# Altium PCB 野火_EBF6ULL F1 核心板_PCB封装参考设计_AD格式.PcbDoc
Units mil, origin at the board's own origin, x right, y up, seen from the top; angles counter-clockwise.
Board outline 2666.42 x 1225.47 mil, 6 copper layers (Signal, Signal #001, Signal #002, Signal #003, Signal #004, Signal #005), stack 47.2 mil thick; 3 components, 2 nets, 206 pads, 0 vias.
Unrouted connection lines stored in the file: 81.
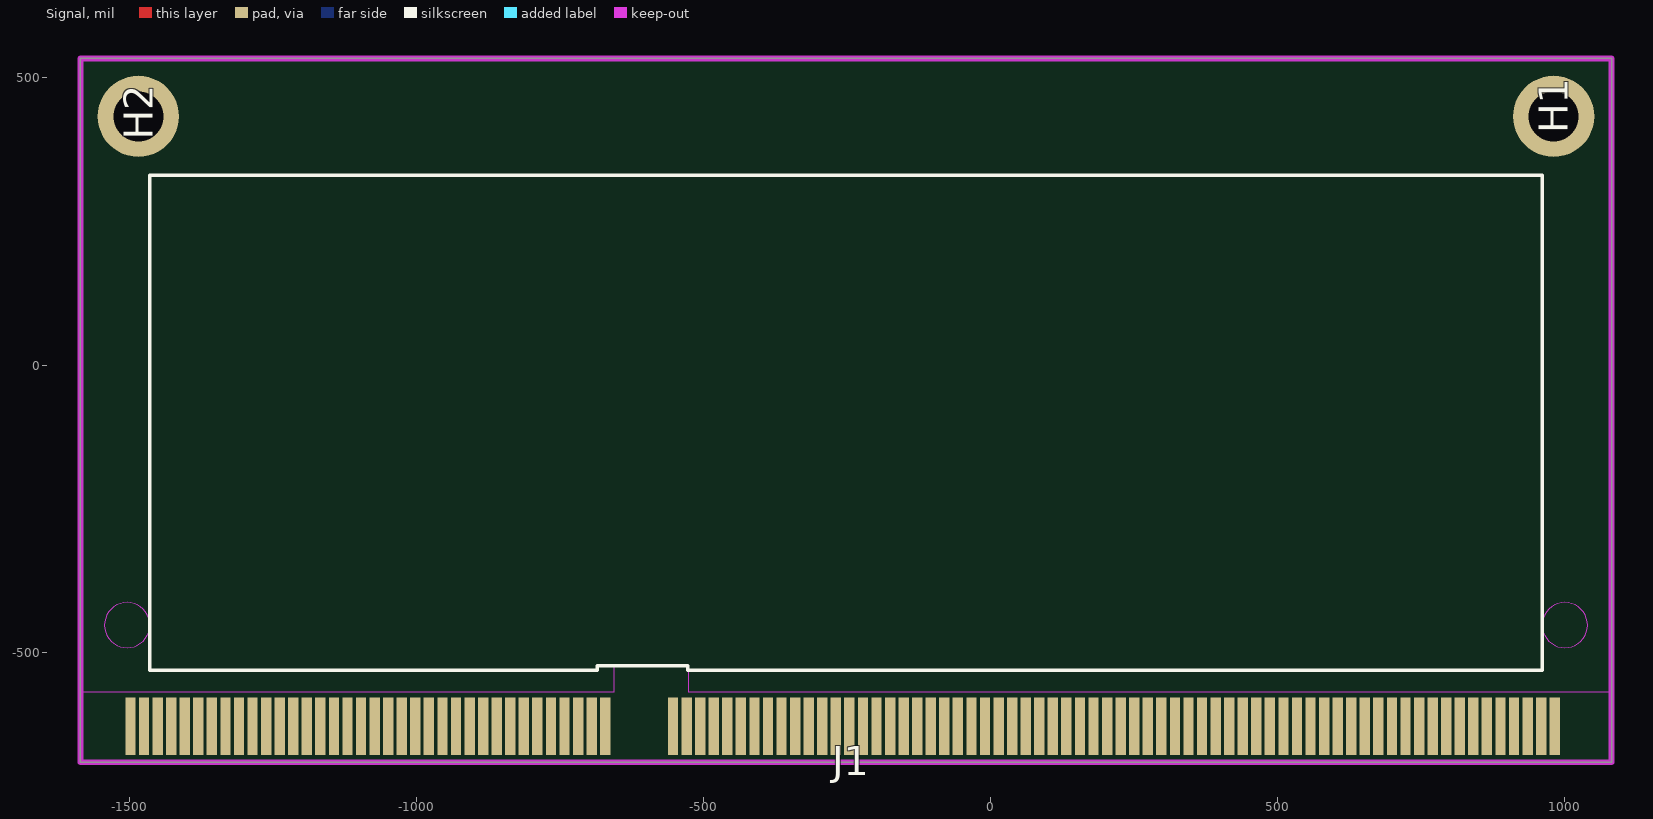
[diagram p0: Signal view]
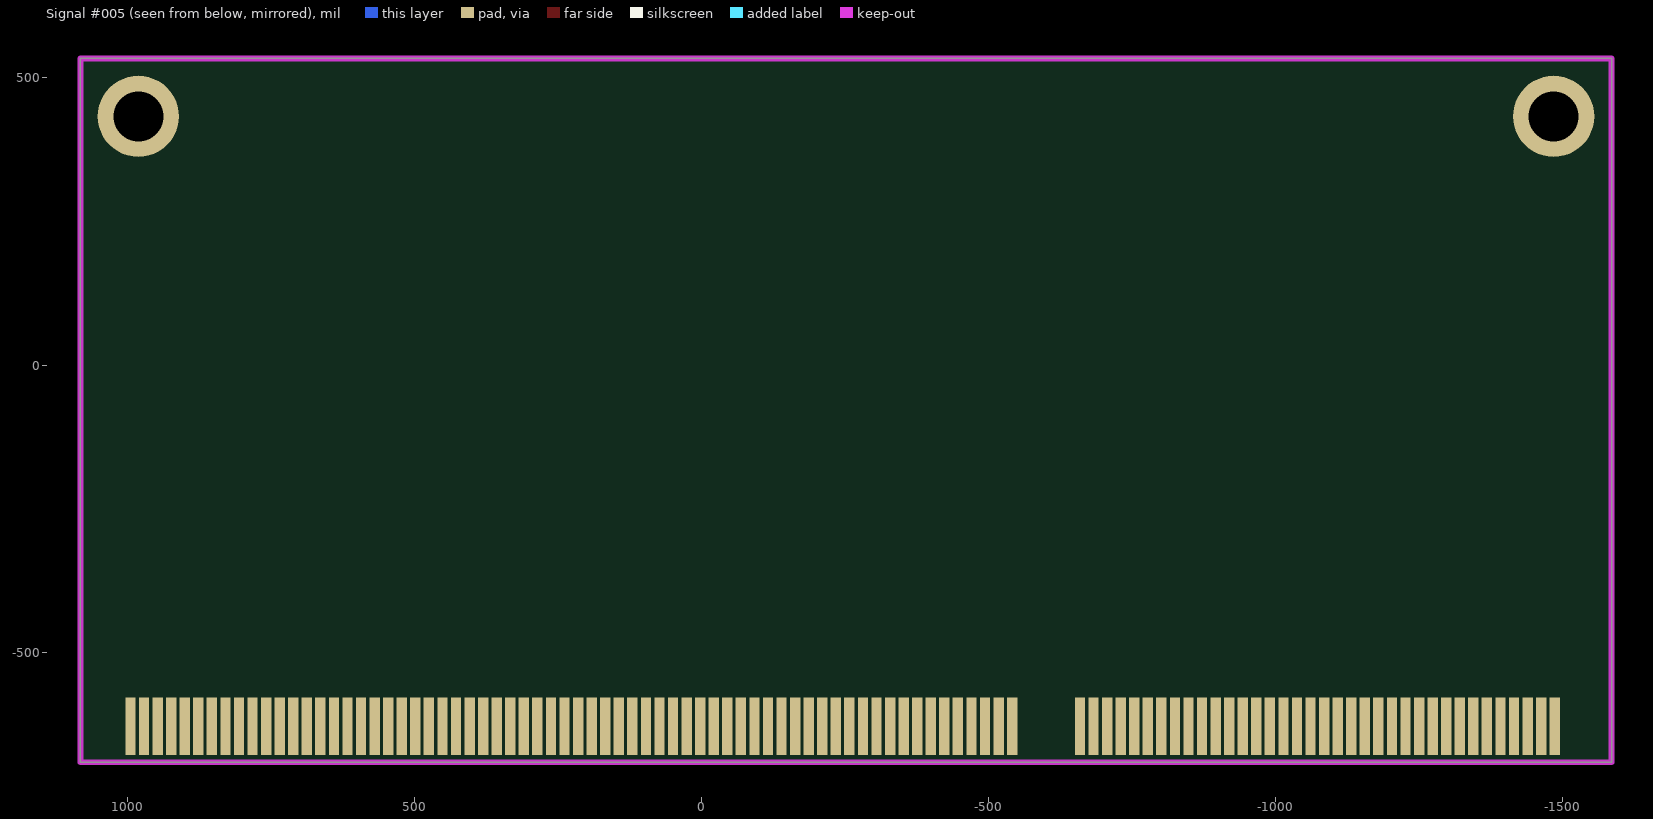
[diagram p1: Signal #005 view, seen from below]

## Layer stack, top to bottom
Solder Mask Top: solder mask 0.4, Solder Resist, Dk 3.5
Signal: signal copper 1.2
Dielectric 1: dielectric 8, FR-4, Dk 4.5
Signal #001: signal copper 1.2
Dielectric2: dielectric 8, FR-4, Dk 4.5
Signal #002: signal copper 1.2
Dielectric3: dielectric 8, FR-4, Dk 4.5
Signal #003: signal copper 1.2
Dielectric4: dielectric 8, FR-4, Dk 4.5
Signal #004: signal copper 1.2
Dielectric5: dielectric 8, FR-4, Dk 4.5
Signal #005: signal copper 1.2
Solder Mask Bottom: solder mask 0.4, Solder Resist, Dk 3.5

## Board outline
-1585.21,-691.5 1081.21,-691.5 1081.21,533.97 -1585.21,533.97

## Design rules (kind name [scope] priority, off if disabled: settings)
Clearance "Clearance - Default - DEFAULT - Via" [IsVia vs IsVia] p1: gap=5 ignorepadtopadclearanceinfootprint=FALSE
Clearance "Clearance - Default - DEFAULT- SMD" [IsVia vs IsSMTPin] p2: gap=5 ignorepadtopadclearanceinfootprint=FALSE
Clearance "Clearance - Default - DEFAULT - Net" [All] p3: gap=5 ignorepadtopadclearanceinfootprint=FALSE except(0: Arc-Hole Track-Hole SMDPad-Hole THPad-Hole Via-Hole Fill-Hole Poly-Hole Region-Hole Text-Hole; 3.9: Via-Fill Via-Poly Via-Region; 6: Arc-THPad Track-THPad SMDPad-THPad THPad-Text; 10: Arc-Fill Arc-Poly Arc-Region Track-Fill Track-Poly Track-Region Fill-Fill Fill-Poly Fill-Region Poly-Poly Poly-Region Region-Region Text-Text)
ComponentClearance "ComponentClearance - Default - DEFAULT" [All] p1: gap=0 collisioncheckmode=3 verticalgap=10 showdistances=FALSE
ComponentClearance "ComponentClearance - Default - " [All] p2: gap=0 collisioncheckmode=3 verticalgap=10 showdistances=FALSE
FanoutControl Fanout_LCC [IsLCC] p1: bgadir=Out bgaviamode=Centered fanoutstyle=Auto fanoutdirection=Alternating viagrid=1 // Fanout_LCC (Default Rule)
FanoutControl Fanout_BGA [IsBGA] p2: bgadir=Out bgaviamode=Centered fanoutstyle=Auto fanoutdirection=Alternating viagrid=1 // Fanout_BGA (Default Rule)
HoleToHoleClearance "HoleToHoleClearance - Default - DEFAULT" [All] p1: gap=8 allowstackedmicrovias=TRUE
Length "Default Length" [All] p1: maxlimit=50000 minlimit=0
MaxMinImpedance "Default Impedance" [All] p1: minimum=50.00 maximum=150.0
ParallelSegment "Default Parallel Segment Adjasent" [All] p1: limit=1000 gap=200
ParallelSegment "Default Parallel Segment Same Layer" [All] p2: limit=1000 gap=200
RoutingLayers "RoutingLayers - Default - DEFAULT" [All] p1: top layer_v5=TRUE mid layer 1_v5=TRUE mid layer 2_v5=TRUE mid layer 3_v5=TRUE mid layer 4_v5=TRUE bottom layer_v5=TRUE
RoutingPriority "RoutingPriority - Default - DEFAULT" [All] p1: routingpriority=3
RoutingTopology "Default Routing Topology" [All] p1: topology=Shortest
RoutingVias "RoutingVias - Default - DEFAULT" [All] p1: holewidth=37 width=55 viastyle="Through Hole" minholewidth=37 minwidth=55 maxholewidth=37 maxwidth=55
SMDToCorner "SMDToCorner - Default - DEFAULT" [All] p1: distance=50000
SolderMaskExpansion [All] p1: expansion=4
Width "Width - NetClass - DIFF90" [InNetClass('DIFF90')] p1: maxlimit=5 minlimit=5 preferedwidth=5
Width "Default Width_1" [All] p2: maxlimit=6 minlimit=6 preferedwidth=6
Width "Default Width" [All] p3: maxlimit=5 minlimit=5 preferedwidth=5
20 further rules are at their usual default settings.

## Components (designator, comment, footprint, x,y, rotation, side; value= is the part's Value field where it differs from the comment)
H1 "T2_5-4" T2_5-4 980.29,433.05 r270 top
H2 "T2_5-4" T2_5-4 -1484.29,433.05 r270 top
J1 "DDR3-SODIMM204-GOLD_FINGER" DDR3-SODIMM204-GOLD_FINGER -252,-689 r0 top

## Footprints (in the part's own frame and the unit in brackets; to place one, negate y for a bottom-side part, rotate by r counter-clockwise, add the part's x,y. Pads: shape width x height; smd on the part's side, far side on the other; paste and mask are expansions set on the pad)
DDR3-SODIMM204-GOLD_FINGER [mil]
  rect 18x100 smd mask+2: 1(-1246.06,60) 3(-1222.44,60) 5(-1198.82,60) 7(-1175.2,60) 9(-1151.57,60) 11(-1127.95,60) 13(-1104.33,60) 15(-1080.71,60) 17(-1057.09,60) 19(-1033.46,60) 21(-1009.84,60) 23(-986.22,60) 25(-962.6,60) 27(-938.98,60) 29(-915.35,60) 31(-891.73,60) 33(-868.11,60) 35(-844.49,60) 37(-820.87,60) 39(-797.24,60) 41(-773.62,60) 43(-750,60) 45(-726.38,60) 47(-702.76,60) 49(-679.13,60) 51(-655.51,60) 53(-631.89,60) 55(-608.27,60) 57(-584.65,60) 59(-561.02,60) 61(-537.4,60) 63(-513.78,60) 65(-490.16,60) 67(-466.54,60) 69(-442.91,60) 71(-419.29,60) 73(-301.18,60) 75(-277.56,60) 77(-253.94,60) 79(-230.31,60) 81(-206.69,60) 83(-183.07,60) 85(-159.45,60) 87(-135.83,60) 89(-112.2,60) 91(-88.58,60) 93(-64.96,60) 95(-41.34,60) 97(-17.72,60) 99(5.91,60) 101(29.53,60) 103(53.15,60) 105(76.77,60) 107(100.39,60) 109(124.02,60) 111(147.64,60) 113(171.26,60) 115(194.88,60) 117(218.5,60) 119(242.13,60) 121(265.75,60) 123(289.37,60) 125(312.99,60) 127(336.61,60) 129(360.24,60) 131(383.86,60) 133(407.48,60) 135(431.1,60) 137(454.72,60) 139(478.35,60) 141(501.97,60) 143(525.59,60) 145(549.21,60) 147(572.83,60) 149(596.46,60) 151(620.08,60) 153(643.7,60) 155(667.32,60) 157(690.94,60) 159(714.57,60) 161(738.19,60) 163(761.81,60) 165(785.43,60) 167(809.06,60) 169(832.68,60) 171(856.3,60) 173(879.92,60) 175(903.54,60) 177(927.17,60) 179(950.79,60) 181(974.41,60) 183(998.03,60) 185(1021.65,60) 187(1045.28,60) 189(1068.9,60) 191(1092.52,60) 193(1116.14,60) 195(1139.76,60) 197(1163.39,60) 199(1187.01,60) 201(1210.63,60) 203(1234.25,60)
  rect 18x100 smd far side mask+2: 2(-1234.25,60) 4(-1210.63,60) 6(-1187.01,60) 8(-1163.39,60) 10(-1139.76,60) 12(-1116.14,60) 14(-1092.52,60) 16(-1068.9,60) 18(-1045.28,60) 20(-1021.65,60) 22(-998.03,60) 24(-974.41,60) 26(-950.79,60) 28(-927.17,60) 30(-903.54,60) 32(-879.92,60) 34(-856.3,60) 36(-832.68,60) 38(-809.06,60) 40(-785.43,60) 42(-761.81,60) 44(-738.19,60) 46(-714.57,60) 48(-690.94,60) 50(-667.32,60) 52(-643.7,60) 54(-620.08,60) 56(-596.46,60) 58(-572.83,60) 60(-549.21,60) 62(-525.59,60) 64(-501.97,60) 66(-478.35,60) 68(-454.72,60) 70(-431.1,60) 72(-407.48,60) 74(-289.37,60) 76(-265.75,60) 78(-242.13,60) 80(-218.5,60) 82(-194.88,60) 84(-171.26,60) 86(-147.64,60) 88(-124.02,60) 90(-100.39,60) 92(-76.77,60) 94(-53.15,60) 96(-29.53,60) 98(-5.91,60) 100(17.72,60) 102(41.34,60) 104(64.96,60) 106(88.58,60) 108(112.2,60) 110(135.83,60) 112(159.45,60) 114(183.07,60) 116(206.69,60) 118(230.31,60) 120(253.94,60) 122(277.56,60) 124(301.18,60) 126(324.8,60) 128(348.43,60) 130(372.05,60) 132(395.67,60) 134(419.29,60) 136(442.91,60) 138(466.54,60) 140(490.16,60) 142(513.78,60) 144(537.4,60) 146(561.02,60) 148(584.65,60) 150(608.27,60) 152(631.89,60) 154(655.51,60) 156(679.13,60) 158(702.76,60) 160(726.38,60) 162(750,60) 164(773.62,60) 166(797.24,60) 168(820.87,60) 170(844.49,60) 172(868.11,60) 174(891.73,60) 176(915.35,60) 178(938.98,60) 180(962.6,60) 182(986.22,60) 184(1009.84,60) 186(1033.46,60) 188(1057.09,60) 190(1080.71,60) 192(1104.33,60) 194(1127.95,60) 196(1151.57,60) 198(1175.2,60) 200(1198.82,60) 202(1222.44,60) 204(1246.06,60)
  Signal keep-out region: 1291.34,236.22 1288.34,251.29 1279.81,264.06 1267.03,272.59 1251.97,275.59 1251.97,275.59 1236.9,272.59 1224.13,264.06 1215.6,251.29 1212.6,236.22 1212.6,236.22 1215.6,221.15 1224.13,208.38 1236.9,199.85 1251.97,196.85 1251.97,196.85 1267.03,199.85 1279.81,208.38 1288.34,221.15 1291.34,236.22
  Signal keep-out region: -1212.6,236.22 -1215.6,251.29 -1224.13,264.06 -1236.9,272.59 -1251.97,275.59 -1251.97,275.59 -1267.03,272.59 -1279.81,264.06 -1288.34,251.29 -1291.34,236.22 -1291.34,236.22 -1288.34,221.15 -1279.81,208.38 -1267.03,199.85 -1251.97,196.85 -1251.97,196.85 -1236.9,199.85 -1224.13,208.38 -1215.6,221.15 -1212.6,236.22
  Signal keep-out region: -1330.71,120 -403.92,120 -403.92,166 -274.92,166 -274.92,120 1330.71,120 1330.71,0 -1330.71,0 -1330.71,120
  silkscreen extent -1213,157 1213,1020
T2_5-4 [mil]
  round 141.73 hole 86.61 mask+1.97: 1(0,0)

## Nets (pads, with @x,y where several pads share a name; then routed paths per layer and width w, separated by ;. In a path a pad name is that pad's centre, name@x,y a point inside that pad or via, vN(x,y) a via of type N, cw(c..) or ccw(c..) an arc to the next point about the centre after c; other vN are vias at no path point)
GND: H1.1 H2.1 J1.11 J1.13 J1.14 J1.15 J1.16 J1.17 J1.26 J1.27 J1.29 J1.35 J1.38 J1.41 J1.47 J1.50 J1.56 J1.59 J1.66 J1.70 J1.71 J1.72 J1.73 J1.74 J1.76 J1.78 J1.80 J1.82 J1.83 J1.84 J1.86 J1.87 J1.88 J1.90 J1.91 J1.92 J1.93 J1.95 J1.99 J1.103 J1.107 J1.110 J1.111 J1.112 J1.115 J1.116 J1.123 J1.124 J1.133 J1.134 J1.139 J1.140 J1.145 J1.146 J1.151 J1.152 J1.154 J1.156 J1.157 J1.158 J1.160 J1.162 J1.163 J1.164 J1.173 J1.174 J1.183 J1.184 J1.193 J1.194 J1.197 J1.198 J1.202 J1.203 J1.204
VCC_SYS: J1.1 J1.2 J1.3 J1.4 J1.5 J1.6 J1.7 J1.8
pads on no net: J1.9 J1.10 J1.12 J1.18 J1.19 J1.20 J1.21 J1.22 J1.23 J1.24 J1.25 J1.28 J1.30 J1.31 J1.32 J1.33 J1.34 J1.36 J1.37 J1.39 J1.40 J1.42 J1.43 J1.44 J1.45 J1.46 J1.48 J1.49 J1.51 J1.52 J1.53 J1.54 J1.55 J1.57 J1.58 J1.60 J1.61 J1.62 J1.63 J1.64 J1.65 J1.67 J1.68 J1.69 J1.75 J1.77 J1.79 J1.81 J1.85 J1.89 J1.94 J1.96 J1.97 J1.98 J1.100 J1.101 J1.102 J1.104 J1.105 J1.106 J1.108 J1.109 J1.113 J1.114 J1.117 J1.118 J1.119 J1.120 J1.121 J1.122 J1.125 J1.126 J1.127 J1.128 J1.129 J1.130 J1.131 J1.132 J1.135 J1.136 J1.137 J1.138 J1.141 J1.142 J1.143 J1.144 J1.147 J1.148 J1.149 J1.150 J1.153 J1.155 J1.159 J1.161 J1.165 J1.166 J1.167 J1.168 J1.169 J1.170 J1.171 J1.172 J1.175 J1.176 J1.177 J1.178 J1.179 J1.180 J1.181 J1.182 J1.185 J1.186 J1.187 J1.188 J1.189 J1.190 J1.191 J1.192 J1.195 J1.196 J1.199 J1.200 J1.201

## Keep-outs
Keep-Out Layer:
  the board outline again, w10

## Silkscreen, mask and mechanical layers (free items; w line width, h text height)
Drill Drawing:
  lines w1: -1577.6,-691.52 -1577.57,-691.52 ; -1484.29,433.05 -1484.27,433.05 ; -1585.22,-690.46 -1585.19,-690.46 ; 980.29,433.05 980.32,433.05 ; 991.33,533.87 991.35,533.87 ; 1007.28,-691.48 1007.3,-691.48 ; 1075.13,-691.5 1075.16,-691.5 ; 1081.24,-677.81 1081.26,-677.81
  lines w10: -1869.38,-691.52 -1627.6,-691.52 ; -1869.38,433.05 -1534.29,433.05 ; -1819.38,-196.73 -1819.38,-691.52 ; -1819.38,-61.73 -1819.38,433.05 ; -1793.04,617.78 -1693.04,617.78 -1537.36,480.01 ; -1585.22,-889.76 -1585.22,-740.46 ; -1484.29,433.05 -1484.27,433.05 ; -436.54,-839.76 -1585.22,-839.76 ; -69.72,-839.76 1081.24,-839.76 ; 1030.29,433.05 1376.3,433.05 ; 1041.33,533.87 1721.18,533.87 ; 1057.28,-691.48 1721.18,-691.48 ; 1081.24,-889.76 1081.24,-727.81 ; 1125.13,-691.5 1376.3,-691.5 ; 1326.3,-196.73 1326.3,-691.5 ; 1326.3,-61.73 1326.3,433.05 ; 1671.18,-146.3 1671.18,-691.48 ; 1671.18,-11.3 1671.18,533.87 ; -1819.38,-691.52 -1794.38,-591.52 -1844.38,-591.52 -1819.38,-691.52 ; -1819.38,433.05 -1844.38,333.05 -1794.38,333.05 -1819.38,433.05 ; -1585.22,-839.76 -1485.22,-864.76 -1485.22,-814.76 -1585.22,-839.76 ; -1537.36,480.01 -1595.68,565.01 -1628.82,527.56 -1537.36,480.01 ; -1537.36,480.01 -1537.33,480.01 ; 1081.24,-839.76 981.24,-814.76 981.24,-864.76 1081.24,-839.76 ; 1326.3,-691.5 1351.3,-591.5 1301.3,-591.5 1326.3,-691.5 ; 1326.3,433.05 1301.3,333.05 1351.3,333.05 1326.3,433.05 ; 1671.18,-691.48 1696.18,-591.48 1646.18,-591.48 1671.18,-691.48 ; 1671.18,533.87 1646.18,433.87 1696.18,433.87 1671.18,533.87
  text "R1.1mm" at -2113.95,580.28 h50
  text "31mm" at 1535.95,-116.3 h50
  text "28.5mm" at -1973.92,-166.73 h50
  text "28.5mm" at 1171.75,-166.73 h50
  text "67.6mm" at -406.54,-877.26 h50